# Altium PCB DIO.PcbDoc
Units mm, origin at the board's own origin, x right, y up, seen from the top; angles counter-clockwise.
Board outline 72 x 36 mm, 2 copper layers (Top Layer, Bottom Layer); 2 components, 42 nets, 126 pads, 0 vias.
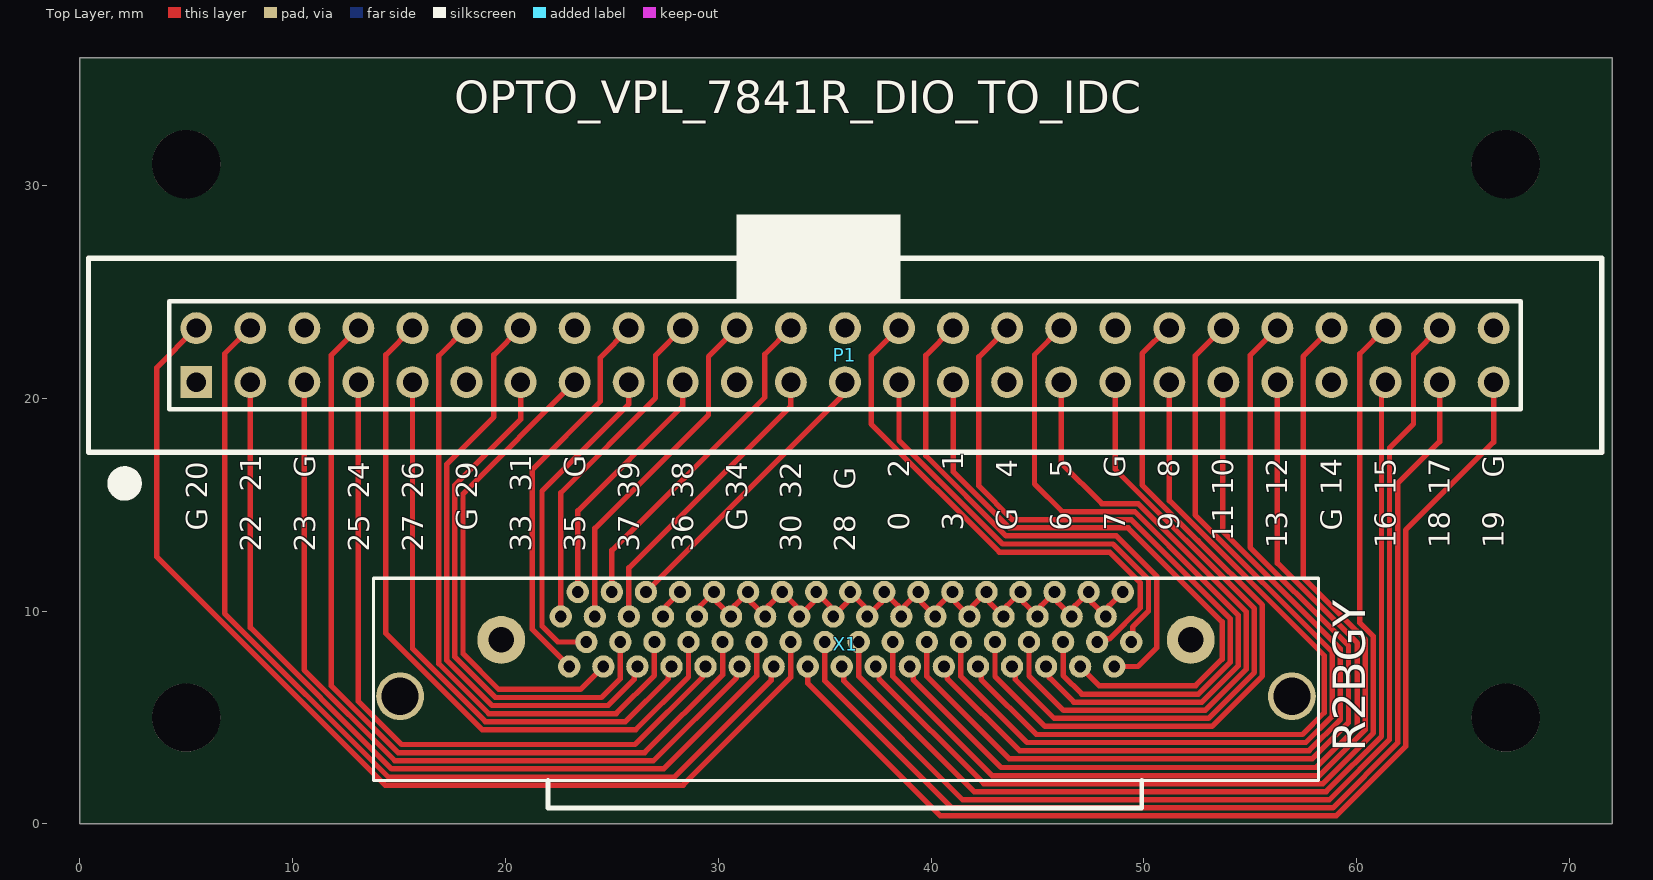
[diagram p0: Top Layer view]
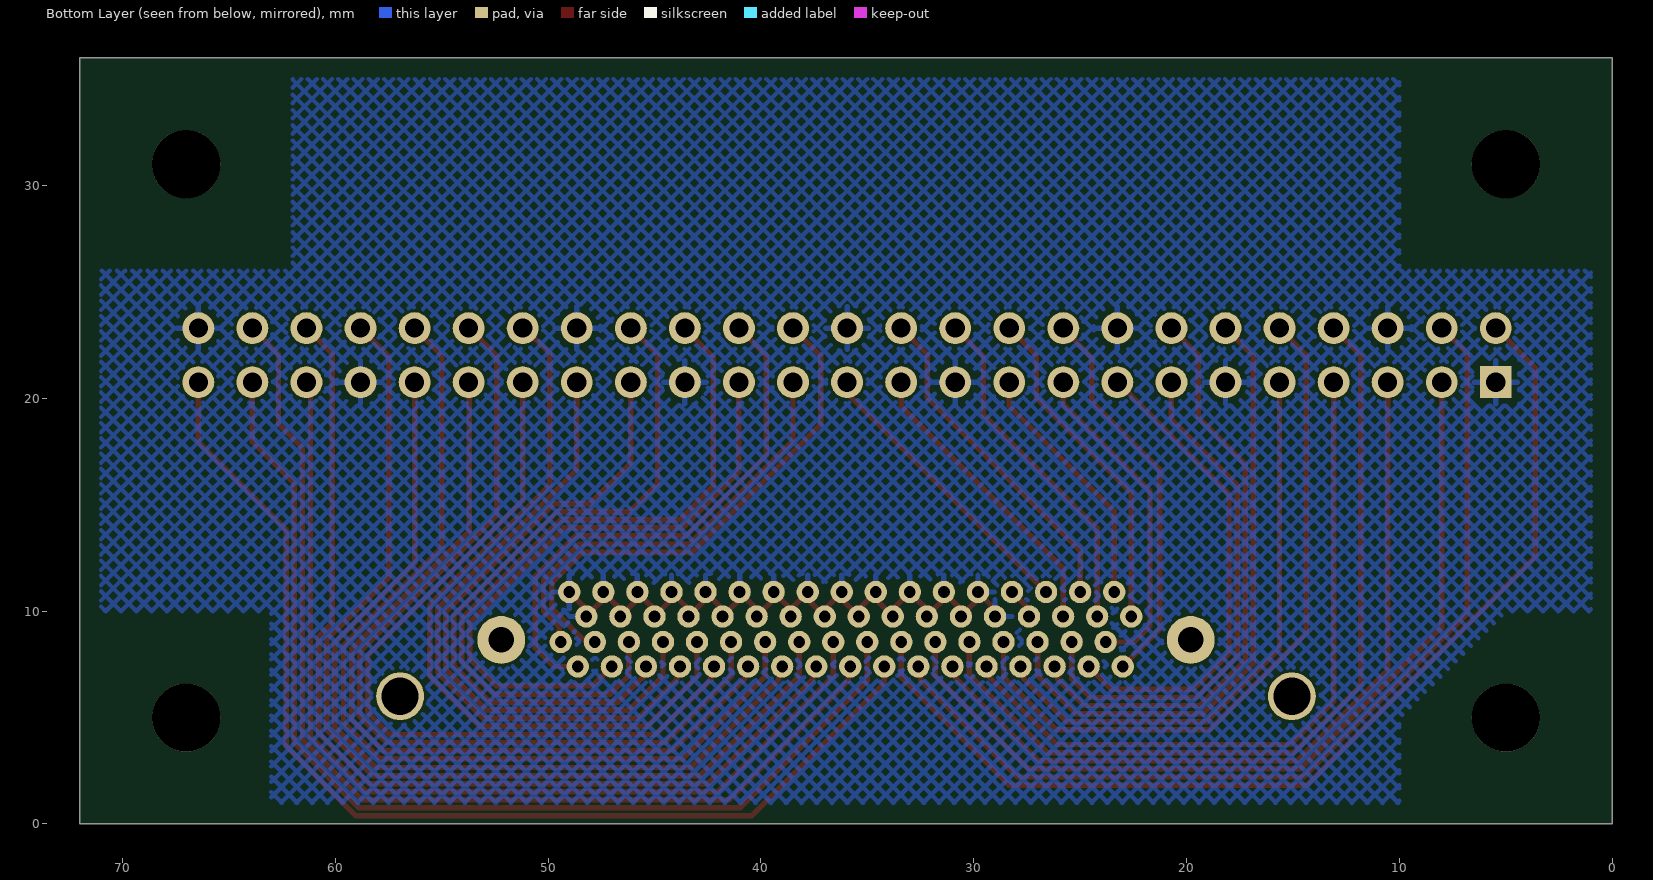
[diagram p1: Bottom Layer view, seen from below]

## Layer stack, top to bottom
Top Solder: solder mask 0.0102, Solder Resist, Dk 3.5
Top Layer: signal copper 0.0356
Dielectric 1: dielectric 0.32, FR-4, Dk 4.8
Bottom Layer: signal copper 0.0356
Bottom Solder: solder mask 0.0102, Solder Resist, Dk 3.5

## Board outline
0,0 0,36 72,36 72,0

## Design rules (kind name [scope] priority, off if disabled: settings)
Clearance [All] p1: gap=0.125 ignorepadtopadclearanceinfootprint=FALSE
PolygonConnect [All] p1: connectstyle=Relief reliefconductorwidth=0.254 reliefentries=4 polygonreliefangle="90 Angle" airgapwidth=0.254
RoutingVias [All] p1: holewidth=0.711 width=1.27 viastyle="Through Hole" minholewidth=0.711 minwidth=1.27 maxholewidth=0.711 maxwidth=1.27
SolderMaskExpansion [All] p1: expansion=0.102 istentingtop=FALSE
Width [All] p1: maxlimit=0.254 minlimit=0.125 preferedwidth=0.254
30 further rules are at their usual default settings.

## Components (designator, comment, footprint, x,y, rotation, side; value= is the part's Value field where it differs from the comment)
P1 "Header 25X2" HDR2X25 5.47,20.757 r0 top
X1 "FPGA_connector" FPGA 15.05,6 r0 top

## Footprints (in the part's own frame and the unit in brackets; to place one, negate y for a bottom-side part, rotate by r counter-clockwise, add the part's x,y. Pads: shape width x height; smd on the part's side, far side on the other; paste and mask are expansions set on the pad)
FPGA [mm] "FPGA Connector"
  round 1.05 hole 0.55: 1(33.95,4.9) 2(33.15,3.75) 3(32.35,4.9) 4(31.55,3.75) 5(30.75,4.9) 6(29.95,3.75) 7(29.15,4.9) 8(28.35,3.75) 9(27.55,4.9) 10(26.75,3.75) 11(25.95,4.9) 12(25.15,3.75) 13(24.35,4.9) 14(23.55,3.75) 15(22.75,4.9) 16(21.95,3.75) 17(21.15,4.9) 18(20.35,3.75) 19(19.55,4.9) 20(18.75,3.75) 21(17.95,4.9) 22(17.15,3.75) 23(16.35,4.9) 24(15.55,3.75) 25(14.75,4.9) 26(13.95,3.75) 27(13.15,4.9) 28(12.35,3.75) 29(11.55,4.9) 30(10.75,3.75) 31(9.95,4.9) 32(9.15,3.75) 33(8.35,4.9) 34(7.55,3.75) 35(34.35,2.55) 36(33.55,1.4) 37(32.75,2.55) 38(31.95,1.4) 39(31.15,2.55) 40(30.35,1.4) 41(29.55,2.55) 42(28.75,1.4) 43(27.95,2.55) 44(27.15,1.4) 45(26.35,2.55) 46(25.55,1.4) 47(24.75,2.55) 48(23.95,1.4) 49(23.15,2.55) 50(22.35,1.4) 51(21.55,2.55) 52(20.75,1.4) 53(19.95,2.55) 54(19.15,1.4) 55(18.35,2.55) 56(17.55,1.4) 57(16.75,2.55) 58(15.95,1.4) 59(15.15,2.55) 60(14.35,1.4) 61(13.55,2.55) 62(12.75,1.4) 63(11.95,2.55) 64(11.15,1.4) 65(10.35,2.55) 66(9.55,1.4) 67(8.75,2.55) 68(7.95,1.4)
  round 2.25 hole 1.2: 69(37.15,2.65) 71(4.75,2.65)
  round 2.25 hole 1.75: 70(41.9,0) 72(0,0)
  silkscreen extent -1.25,-5.25 43.15,5.55
HDR2X25 [mm] "Connector; Header; 25x2 Position"
  rect 1.5x1.5 hole 0.9: 1(0,0)
  round 1.5 hole 0.9: 2(0,2.54) 3(2.54,0) 4(2.54,2.54) 5(5.08,0) 6(5.08,2.54) 7(7.62,0) 8(7.62,2.54) 9(10.16,0) 10(10.16,2.54) 11(12.7,0) 12(12.7,2.54) 13(15.24,0) 14(15.24,2.54) 15(17.78,0) 16(17.78,2.54) 17(20.32,0) 18(20.32,2.54) 19(22.86,0) 20(22.86,2.54) 21(25.4,0) 22(25.4,2.54) 23(27.94,0) 24(27.94,2.54) 25(30.48,0) 26(30.48,2.54) 27(33.02,0) 28(33.02,2.54) 29(35.56,0) 30(35.56,2.54) 31(38.1,0) 32(38.1,2.54) 33(40.64,0) 34(40.64,2.54) 35(43.18,0) 36(43.18,2.54) 37(45.72,0) 38(45.72,2.54) 39(48.26,0) 40(48.26,2.54) 41(50.8,0) 42(50.8,2.54) 43(53.34,0) 44(53.34,2.54) 45(55.88,0) 46(55.88,2.54) 47(58.42,0) 48(58.42,2.54) 49(60.96,0) 50(60.96,2.54)
  silkscreen extent -1.27,-1.27 62.23,3.81

## Part data
P1: "Header, 25-Pin, Dual row", LatestRevisionDate=17-Jul-2002, LatestRevisionNote="Re-released for DXP Platform.", Publisher="Altium Limited"
X1: library part FPGA_Connector

## Free pads (board coordinates)
  round 3.2 hole 3.2 unplated: 0(5,5) 0(5,31) 0(67,5) 0(67,31)

## Nets (pads, with @x,y where several pads share a name; then routed paths per layer and width w, separated by ;. In a path a pad name is that pad's centre, name@x,y a point inside that pad or via, vN(x,y) a via of type N, cw(c..) or ccw(c..) an arc to the next point about the centre after c; other vN are vias at no path point)
+5V: X1.27 X1.28 | length 1.5
  Top Layer w0.254: X1.28 27.552,9.902 27.552,10.252 X1.27
DGND: P1.1 P1.6 P1.11 P1.16 P1.21 P1.26 P1.31 P1.36 P1.43 P1.50 X1.1 X1.2 X1.3 X1.4 X1.5 X1.6 X1.7 X1.8 X1.9 X1.10 X1.11 X1.12 X1.13 X1.14 X1.15 X1.16 X1.17 X1.18 X1.19 X1.20 X1.21 X1.22 X1.23 X1.24 X1.25 X1.26 | length 37
  Top Layer w0.254: X1.26 29.152,9.902 29.152,10.252 X1.25 29.952,10.748 29.952,10.398 X1.24 30.752,9.902 30.752,10.252 X1.23 31.552,10.748 31.552,10.398 X1.22 32.352,9.902 32.352,10.252 X1.21 33.648,10.252 33.648,9.902 X1.20 34.448,10.398 34.448,10.748 X1.19 35.248,10.252 35.248,9.902 X1.18 36.048,10.398 36.048,10.748 X1.17 36.848,10.252 36.848,9.902 X1.16 37.648,10.398 37.648,10.748 X1.15 38.448,10.252 38.448,9.902 X1.14 38.752,9.902 38.752,10.252 X1.13 39.552,10.748 39.552,10.398 X1.12 40.352,9.902 40.352,10.252 X1.11 41.152,10.748 41.152,10.398 X1.10 41.952,9.902 41.952,10.252 X1.9 42.752,10.748 42.752,10.398 X1.8 43.552,9.902 43.552,10.252 X1.7 44.352,10.748 44.352,10.398 X1.6 45.152,9.902 45.152,10.252 X1.5 45.952,10.748 45.952,10.398 X1.4 46.752,9.902 46.752,10.252 X1.3 47.552,10.748 47.552,10.398 X1.2 48.352,9.902 48.352,10.252 X1.1
DIO0: P1.27 X1.35 | length 20.4
  Top Layer w0.254: P1.27 38.49,18.028 43.362,13.155 48.544,13.155 50.214,11.485 50.214,10.003 49.467,9.256 49.467,8.617 X1.35
DIO1: P1.30 X1.36 | length 25.4
  Top Layer w0.254: P1.30 39.751,22.018 39.751,17.303 43.519,13.534 48.701,13.534 50.593,11.642 50.593,8.276 49.716,7.4 X1.36
DIO2: P1.28 X1.37 | length 24.7
  Top Layer w0.254: P1.28 37.186,21.993 37.186,18.796 43.205,12.776 48.387,12.776 49.835,11.328 49.835,10.16 48.377,8.702 47.952,8.702 X1.37
DIO3: P1.29 X1.38 | length 29.1
  Top Layer w0.254: P1.29 41.03,16.56 43.676,13.913 49.254,13.913 53.67,9.497 53.67,7.747 52.426,6.502 47.898,6.502 X1.38
DIO4: P1.32 X1.39 | length 34.8
  Top Layer w0.254: P1.32@43.581,23.286 42.24,21.946 42.24,15.885 43.833,14.292 49.411,14.292 51.994,11.709 54.049,9.654 54.049,7.59 52.561,6.102 47.086,6.102 46.2,6.988 X1.39
DIO5: P1.34 X1.40 | length 33
  Top Layer w0.254: X1.40 45.552,7.248 45.552,6.873 46.703,5.723 52.718,5.723 54.428,7.433 54.428,9.811 52.694,11.546 49.568,14.671 46.162,14.671 44.856,15.977 44.856,22.047 P1.34@46.108,23.299
DIO6: P1.33 X1.41 | length 31.3
  Top Layer w0.254: X1.41 44.6,6.962 46.218,5.344 52.875,5.344 54.807,7.276 54.807,9.968 52.851,11.925 49.725,15.05 48.018,15.05 46.11,16.958 P1.33
DIO7: P1.35 X1.42 | length 29.9
  Top Layer w0.254: X1.42 43.952,7.248 43.952,6.797 45.785,4.965 53.032,4.965 55.186,7.119 55.186,10.125 48.65,16.661 P1.35
DIO8: P1.38 X1.43 | length 35.4
  Top Layer w0.254: X1.43 43,6.936 45.351,4.586 53.189,4.586 55.565,6.962 55.565,10.282 52.545,13.302 49.911,15.936 49.911,22.098 P1.38@51.15,23.337
DIO9: P1.37 X1.44 | length 36.8
  Top Layer w0.254: X1.44 42.352,7.248 42.352,6.797 44.942,4.207 57.445,4.207 58.471,5.232 58.471,7.912 51.19,15.193 P1.37
DIO10: P1.40 X1.45 | length 42.3
  Top Layer w0.254: X1.45 41.4,6.936 44.509,3.828 57.602,3.828 58.85,5.075 58.85,8.069 52.4,14.519 52.4,21.996 P1.40@53.716,23.312
DIO11: P1.39 X1.46 | length 39.2
  Top Layer w0.254: X1.46 40.752,7.248 40.752,6.847 44.151,3.449 57.759,3.449 59.229,4.918 59.229,7.341 59.229,8.226 53.696,13.76 P1.39@53.696,20.757
DIO12: P1.42 X1.47 | length 44.7
  Top Layer w0.254: X1.47 39.8,6.936 43.666,3.07 57.916,3.07 59.608,4.761 59.608,8.383 59.21,8.782 54.991,13 54.991,22.018 P1.42
DIO13: P1.41 X1.48 | length 41.8
  Top Layer w0.254: X1.48 39.152,7.248 39.152,6.796 43.294,2.655 58.088,2.655 60.022,4.59 60.022,8.505 59.367,9.161 56.27,12.257 P1.41
DIO14: P1.44 X1.49 | length 47.3
  Top Layer w0.254: X1.49 38.2,6.936 42.86,2.276 58.245,2.276 60.401,4.433 60.401,8.662 59.524,9.54 57.48,11.583 57.48,21.968 P1.44
DIO15: P1.46 X1.50 | length 46.7
  Top Layer w0.254: X1.50 37.552,7.248 37.552,6.821 42.477,1.897 58.402,1.897 60.78,4.276 60.78,8.819 60.147,9.452 60.147,22.095 P1.46
DIO16: P1.45 X1.51 | length 46.2
  Top Layer w0.254: X1.51 36.6,6.936 42.018,1.518 58.559,1.518 61.159,4.119 61.159,20.567 P1.45
DIO17: P1.48 X1.52 | length 50.1
  Top Layer w0.254: X1.52 35.897,7.303 35.897,6.724 41.482,1.139 58.716,1.139 61.538,3.962 61.538,17.673 62.662,18.796 62.662,22.069 P1.48
DIO18: P1.47 X1.53 | length 50.2
  Top Layer w0.254: X1.53 35,6.732 40.972,0.76 58.873,0.76 61.917,3.805 61.917,15.994 63.89,17.967 P1.47
DIO19: P1.49 X1.54 | length 51.6
  Top Layer w0.254: X1.54 34.2,6.618 40.437,0.381 59.03,0.381 62.296,3.648 62.296,13.808 66.43,17.941 P1.49
DIO20: P1.2 X1.55 | length 49.5
  Top Layer w0.254: P1.2 3.607,21.434 3.607,12.56 14.338,1.829 28.346,1.829 33.4,6.882 X1.55
DIO21: P1.4 X1.56 | length 45.3
  Top Layer w0.254: P1.4 6.807,22.095 6.807,9.896 14.493,2.21 27.94,2.21 32.478,6.748 32.478,7.278 X1.56
DIO22: P1.3 X1.57 | length 41.5
  Top Layer w0.254: P1.3 8.01,9.229 14.646,2.593 16.864,2.593 16.866,2.591 27.432,2.591 31.8,6.959 X1.57
DIO23: P1.5 X1.58 | length 37.8
  Top Layer w0.254: P1.5@10.541,20.757 10.541,7.234 14.803,2.972 26.949,2.972 30.848,6.87 30.848,7.248 X1.58
DIO24: P1.8 X1.59 | length 40.1
  Top Layer w0.254: P1.8 11.811,22.018 11.811,6.5 14.958,3.353 26.543,3.353 30.2,7.01 X1.59
DIO25: P1.7 X1.60 | length 33.9
  Top Layer w0.254: P1.7 13.09,5.757 15.113,3.734 26.086,3.734 29.248,6.896 29.248,7.248 X1.60
DIO26: P1.10 X1.61 | length 33.6
  Top Layer w0.254: P1.10 14.376,22.044 14.376,8.953 18.9,4.43 26.121,4.43 28.6,6.908 X1.61
DIO27: P1.9 X1.62 | length 27.4
  Top Layer w0.254: P1.9 15.63,8.236 19.057,4.809 25.637,4.809 27.648,6.82 27.648,7.248 X1.62
DIO28: P1.25 X1.29 | length 13.7
  Top Layer w0.254: X1.29 35.95,20.25 P1.25
DIO29: P1.12 X1.63 | length 29.7
  Top Layer w0.254: P1.12 16.866,21.993 16.866,7.536 19.214,5.188 25.203,5.188 27,6.985 X1.63
DIO30: P1.23 X1.30 | length 14.2
  Top Layer w0.254: X1.30 25.8,12.033 33.41,19.643 P1.23
DIO31: P1.14 X1.64 | length 27.9
  Top Layer w0.254: P1.14 19.456,22.044 19.456,19.126 17.245,16.914 17.245,7.693 19.371,5.567 24.82,5.567 26.048,6.794 26.048,7.248 X1.64
DIO32: P1.24 X1.31 | length 15.9
  Top Layer w0.254: X1.31 25,12.859 32.182,20.041 32.182,22.069 P1.24
DIO33: P1.13 X1.65 | length 24.8
  Top Layer w0.254: P1.13 20.71,19.008 17.624,15.922 17.624,7.85 19.528,5.946 24.513,5.946 25.4,6.833 X1.65
DIO34: P1.22 X1.32 | length 16.3
  Top Layer w0.254: X1.32 24.2,13.888 29.54,19.228 29.54,21.968 P1.22
DIO35: P1.15 X1.66 | length 22.7
  Top Layer w0.254: P1.15 18.003,15.51 18.003,8.007 19.685,6.325 23.525,6.325 X1.66
DIO36: P1.19 X1.33 | length 11.9
  Top Layer w0.254: X1.33 23.4,14.713 28.33,19.643 P1.19
DIO37: P1.17 X1.67 | length 15.5
  Top Layer w0.254: X1.67 22.463,8.55 21.717,9.296 21.717,15.646 25.79,19.719 P1.17
DIO38: P1.20 X1.34 | length 15.9
  Top Layer w0.254: X1.34 22.6,15.564 27.051,20.015 27.051,22.018 P1.20
DIO39: P1.18 X1.68 | length 18.5
  Top Layer w0.254: X1.68 21.26,9.14 21.26,16.662 24.46,19.863 24.46,21.92 P1.18@25.814,23.274
pads on no net: X1.69 X1.70 X1.71 X1.72

## Polygon pours and split planes (outlines as drawn)
DGND on Bottom Layer "Top Overlay-No Net" (hatched 45Degree grid 0.508 track 0.203, remove dead copper, pour order 0): 1,1 1,35 71,35 71,1

## Other copper
Bottom Layer:
  pour cut-out: 0,0 0,10 5,10 10,5 10,0
  pour cut-out: 63,10 63,0 72,0 72,10
  pour cut-out: 62,36 62,26 72,26 72,36
  pour cut-out: 0,36 0,26 10,26 10,36

## Silkscreen, mask and mechanical layers (free items; w line width, h text height)
Top Overlay:
  circle w0.854: c2.108,16.002 r0.381
  rectangle: 30.845,26.625 38.564,28.634
  rectangle: 30.845,24.618 38.564,26.627
  lines w0.254: 0.408,17.476 71.508,17.476 71.508,26.576 0.408,26.576 0.408,17.476
  text "OPTO_VPL_7841R_DIO_TO_IDC" at 17.591,33.401 h1.52
  text "1" at 41.517,16.603 h1 r90
  text "G" at 11.062,16.27 h1 r90
  text "G" at 23.751,16.27 h1 r90
  text "2" at 38.979,16.27 h1 r90
  text "4" at 44.054,16.27 h1 r90
  text "5" at 46.592,16.27 h1 r90
  text "G" at 49.13,16.27 h1 r90
  text "8" at 51.668,16.27 h1 r90
  text "G" at 66.895,16.27 h1 r90
  text "G" at 36.441,15.694 h1 r90
  text "21" at 8.524,15.604 h1 r90
  text "31" at 21.214,15.604 h1 r90
  text "10" at 54.206,15.437 h1 r90
  text "12" at 56.744,15.437 h1 r90
  text "14" at 59.282,15.437 h1 r90
  text "15" at 61.82,15.437 h1 r90
  text "17" at 64.358,15.437 h1 r90
  text "20" at 5.986,15.271 h1 r90
  text "24" at 13.6,15.271 h1 r90
  text "26" at 16.138,15.271 h1 r90
  text "29" at 18.676,15.271 h1 r90
  text "39" at 26.289,15.271 h1 r90
  text "38" at 28.827,15.271 h1 r90
  text "34" at 31.365,15.271 h1 r90
  text "32" at 33.903,15.271 h1 r90
  text "G" at 5.986,13.781 h1 r90
  text "G" at 18.676,13.781 h1 r90
  text "G" at 31.365,13.781 h1 r90
  text "0" at 38.979,13.781 h1 r90
  text "3" at 41.517,13.781 h1 r90
  text "G" at 44.054,13.781 h1 r90
  text "6" at 46.592,13.781 h1 r90
  text "7" at 49.13,13.781 h1 r90
  text "9" at 51.668,13.781 h1 r90
  text "G" at 59.282,13.781 h1 r90
  text "11" at 54.206,13.281 h1 r90
  text "13" at 56.744,12.948 h1 r90
  text "16" at 61.82,12.948 h1 r90
  text "18" at 64.357,12.948 h1 r90
  text "19" at 66.895,12.948 h1 r90
  text "22" at 8.524,12.781 h1 r90
  text "23" at 11.062,12.781 h1 r90
  text "25" at 13.6,12.781 h1 r90
  text "27" at 16.138,12.781 h1 r90
  text "33" at 21.214,12.781 h1 r90
  text "35" at 23.751,12.781 h1 r90
  text "37" at 26.289,12.781 h1 r90
  text "36" at 28.827,12.781 h1 r90
  text "30" at 33.903,12.781 h1 r90
  text "28" at 36.441,12.781 h1 r90
  text "R2BGY" at 60.401,3.405 h1.52 r90
Mechanical 1:
  the board outline again, w0.254